# Altium PCB 传感器控制继电器模块.PCBDOC
Units mm, origin at the board's own origin, x right, y up, seen from the top; angles counter-clockwise.
Board outline 152.4 x 101.6 mm, 2 copper layers (Top Layer, Bottom Layer); 14 components, 11 nets, 44 pads, 1 vias.
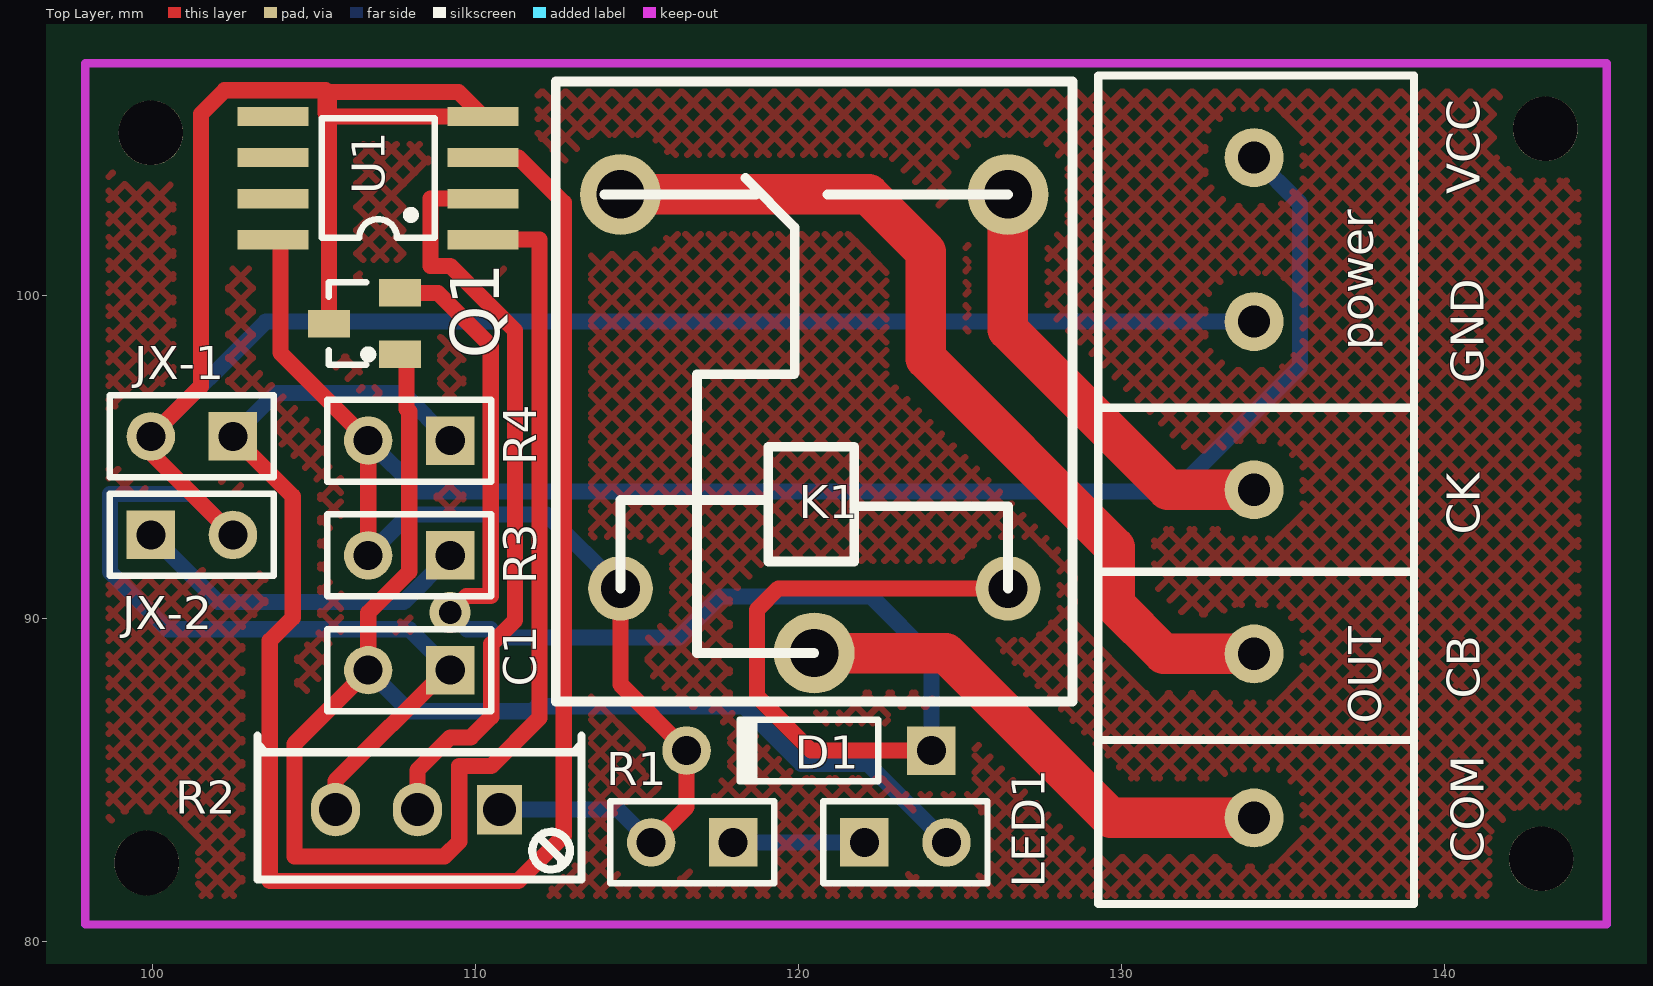
[diagram p0: Top Layer view]
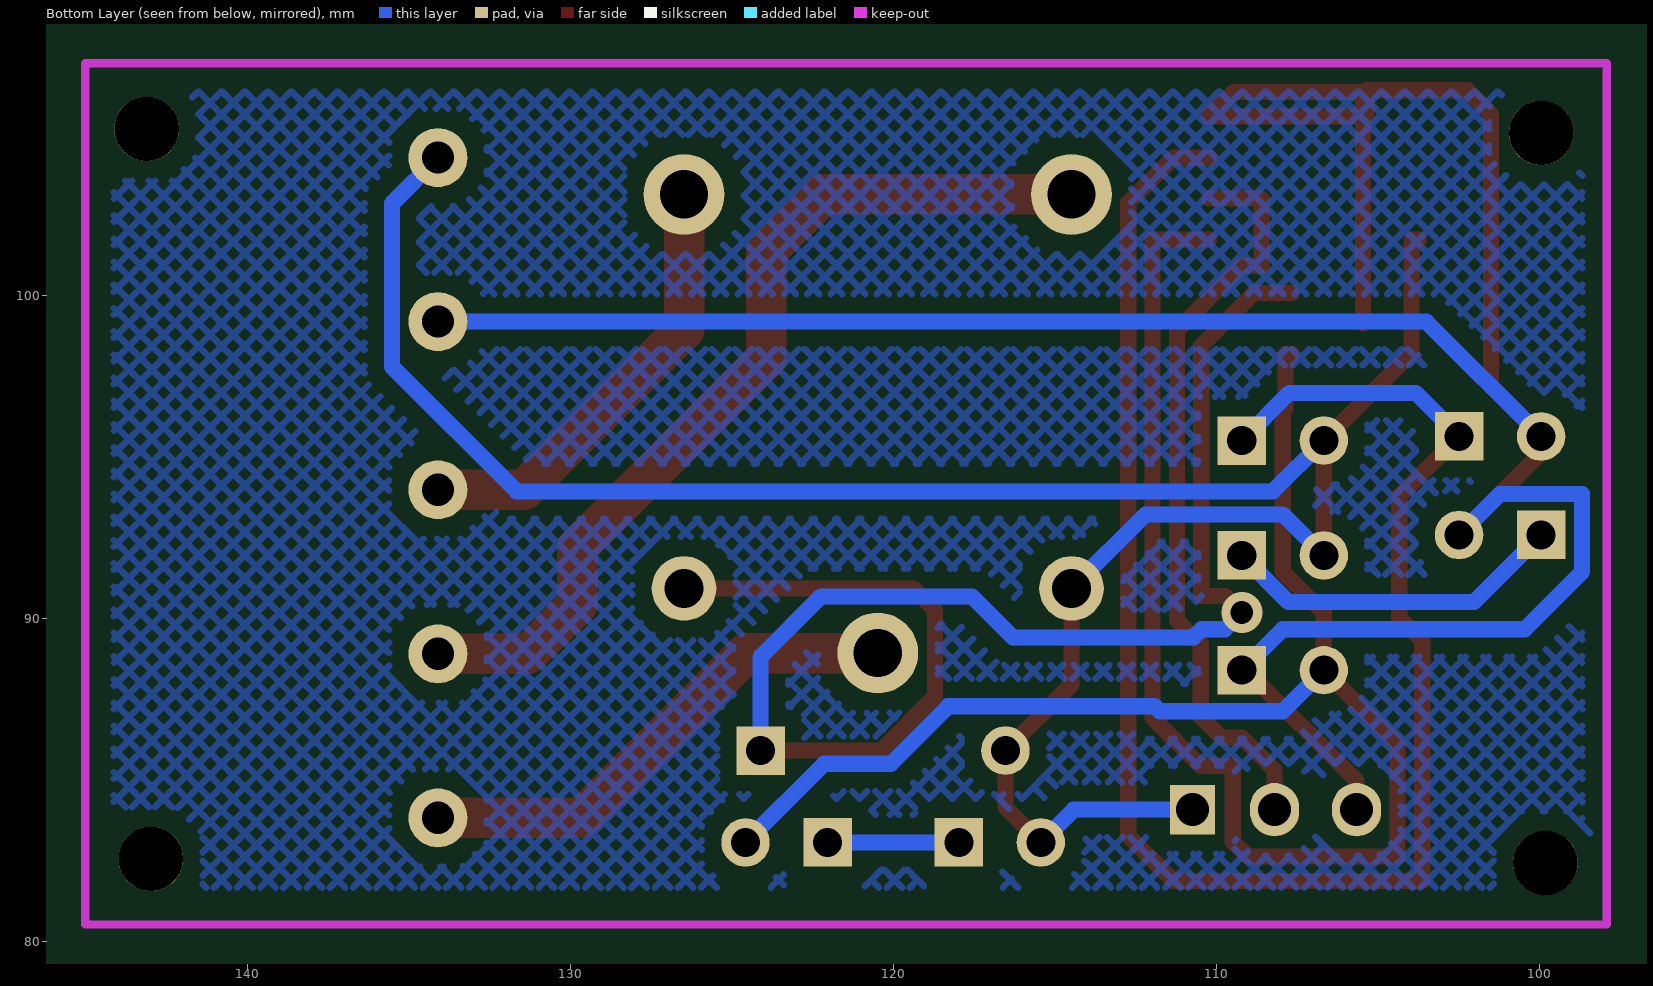
[diagram p1: Bottom Layer view, seen from below]

## Layer stack, top to bottom
Top Layer: signal copper 0.0356
Dielectric: dielectric 0.32, FR-4, Dk 4.8
Bottom Layer: signal copper 0.0356

## Board outline
25.4,25.4 177.8,25.4 177.8,127 25.4,127

## Design rules (kind name [scope] priority, off if disabled: settings)
Clearance [All] p1: gap=0.5
ComponentClearance [All] p1: gap=0.254 collisioncheckmode=3 verticalgap=0.254
PolygonConnect [All] p1: connectstyle=Relief reliefconductorwidth=0.254 reliefentries=4 polygonreliefangle="90 Angle"
RoomDefinition 传感器控制继电器模块 [InComponentClass('传感器控制继电器模块')] p1: confinementstyle=ConfineIn formatcopy=TRUE lockcomponents=FALSE outline 0,0 50.8,0 50.8,25.4 0,25.4
RoutingVias [All] p1: holewidth=0.711 width=1.27 viastyle="Through Hole" minholewidth=0.711 minwidth=1.27 maxholewidth=0.711 maxwidth=1.27
SolderMaskExpansion [All] p1: expansion=0.102
TestPointUsage [All] p1: valid=0 allowmultiple=FALSE
Testpoint [All] p1: side=15 testpointundercomponent=TRUE minsize=1.016 maxsize=2.54 preferedsize=1.524 minholesize=0 maxholesize=1.016 preferedholesize=0.813 testpointgrid=0.025 style=1023 order=0-112345678
Width Width_3 [InNet('NetK1_2')] p1: maxlimit=1.254 minlimit=1.254 preferedwidth=1.254
Width Width_2 [InNet('NetK1_3')] p2: maxlimit=1.254 minlimit=1.254 preferedwidth=1.254
Width Width_1 [InNet('NetK1_1')] p3: maxlimit=1.254 minlimit=1.254 preferedwidth=1.254
Width [All] p4: maxlimit=0.5 minlimit=0.5 preferedwidth=0.5
17 further rules are at their usual default settings.

## Components (designator, comment, footprint, x,y, rotation, side; value= is the part's Value field where it differs from the comment)
C1 "" HDR1X2 109.22,88.392 r180 top
D1 "ZL2JG" D-ZL-10 116.586,85.852 r180 top
JX-1 "" HDR1X2 102.489,95.631 r180 top
JX-2 "" HDR1X2 99.949,92.583 r0 top
K1 "JDQYCK" JQC-3F/T73 125.984,89.408 r90 top
LED1 "" HDR1X2 122.047,83.058 r0 top
OUT "PZ_3" JK128_3 136.017,89.027 r0 top
power "PZ_2" DYDZ 135.255,103.759 r0 top (schematic designator prower)
Q1 "TPSJG_PNP" SO-G3 106.68,100.076 r90 top
R1 "" HDR1X2 117.983,83.058 r180 top
R2 "" SIP3-D 110.744,84.328 r180 top
R3 "" HDR1X2 109.22,91.948 r180 top
R4 "" HDR1X2 109.22,95.504 r180 top
U1 "LM393AD" CDFP-8 110.744,106.172 r90 top

## Footprints (in the part's own frame and the unit in brackets; to place one, negate y for a bottom-side part, rotate by r counter-clockwise, add the part's x,y. Pads: shape width x height; smd on the part's side, far side on the other; paste and mask are expansions set on the pad)
CDFP-8 [mm] "贴片8管脚"
  rect 0.6x2.2 smd: 1(-4.445,0.508) 2(-3.175,0.508) 3(-1.905,0.508) 4(-0.635,0.508) 5(-0.635,7.008) 6(-1.905,7.008) 7(-3.175,7.008) 8(-4.445,7.008)
  silkscreen extent -4.39,2.01 -0.69,5.51
D-ZL-10 [mm] "整流二极管"
  rect 1.5x1.5 hole 0.9: 1(-7.532,-0.051)
  round 1.5 hole 0.9: 2(0.048,-0.051)
  silkscreen extent -5.89,-1 -1.5,0.9
DYDZ [mil] "接线端子"
  round 71.81 hole 39.37: 1(-45,20) 2(-45,-180)
  silkscreen extent -235,-285 150,120
HDR1X2 [mm] "Connector; Header; 2 Position"
  rect 1.5x1.5 hole 0.9: 1(0,0)
  round 1.5 hole 0.9: 2(2.54,0)
  silkscreen extent -1.27,-1.27 3.81,1.27
JK128_3 [mm] "接线端子_3"
  round 1.824 hole 1: 1(-1.905,4.953) 2(-1.905,-0.127) 3(-1.905,-5.207)
  silkscreen extent -6.73,-7.87 3.05,7.49
JQC-3F/T73 [mm] "继电器"
  round 2.5 hole 1.5: 1(13.716,-0.508) 2(13.716,11.492) 3(-0.484,5.492)
  round 2 hole 1.2: 4(1.516,11.492) 5(1.516,-0.508)
  silkscreen extent -1.98,-2.51 17.22,13.49
SIP3-D [mil] "精调电位器"
  rect 55x60 hole 40: 1(0,10)
  oval 60x65 hole 40: 2(200,10) 3(100,10)
  silkscreen extent -100,-80 295,95
SO-G3 [mm] "贴片三极管"
  rect 0.85x1.3 smd: 1(-1.9,-0.983) 2(0,-0.983) 3(-0.95,1.217)
  silkscreen extent -2.23,-0.13 0.32,1.22

## Part data
C1: library part "Cap Semi", "Capacitor (Semiconductor SIM Model)"
D1: "整流二极管"
JX-1: library part "Photo Sen", "Photosensitive Diode"
JX-2 LED1: library part LED3, "Typical BLUE SiC LED"
K1: "继电器——1常开1常闭"
OUT: "排针——3"
power: "排针——2"
Q1: "贴片三极管——PNP"
R1 R3 R4: library part Res2, "Resistor"
R2: library part RPot, "Potentiometer"
U1: "Low-Power Dual Voltage Comparator"

## Free pads (board coordinates)
  round 2 hole 2: 0(99.822,82.423) 0(99.949,105.029) 0(143.002,82.55) 0(143.129,105.156)

## Via types
v1: diameter 1.27, hole 0.711, Top Layer to Bottom Layer, 1 vias

## Nets (pads, with @x,y where several pads share a name; then routed paths per layer and width w, separated by ;. In a path a pad name is that pad's centre, name@x,y a point inside that pad or via, vN(x,y) a via of type N, cw(c..) or ccw(c..) an arc to the next point about the centre after c; other vN are vias at no path point)
GND: C1.1 JX-1.2 JX-2.2 power.2 Q1.3 R2.2 U1.4 | length 96.8
  Top Layer w0.5: JX-2.2 99.949,95.123 JX-1.2 101.498,97.18 101.498,105.613 102.235,106.35 105.359,106.35 105.359,105.639 105.461,105.537 105.463,105.537 ; Q1.3@105.461,99.126 Q1.3 105.463,105.537 ; R2.2 105.664,84.963 109.093,88.392 C1.1 ; 105.463,105.537 105.463,106.246 105.516,106.299 109.474,106.299 U1.4 105.463,105.537
  Bottom Layer w0.5: JX-1.2 103.505,99.187 power.2 ; JX-2.2 101.219,93.853 98.679,93.853 98.679,91.44 100.457,89.662 107.95,89.662 C1.1
NetC1_2: C1.2 LED1.2 Q1.1 U1.1 | length 64.8
  Top Layer w0.5: Q1.1 107.866,98.176 107.866,96.483 107.95,96.399 107.95,91.44 106.68,90.17 C1.2 104.394,86.106 104.394,82.626 109.042,82.626 109.499,83.083 109.499,85.42 110.49,85.42 111.982,86.912 111.982,101.727 U1.1
  Bottom Layer w0.5: C1.2 107.95,87.122 111.76,87.122 111.912,87.274 118.313,87.274 120.091,85.496 122.149,85.496 LED1.2
NetD1_1: D1.1 K1.5 Q1.2 | length 48.9
  Top Layer w0.5: Q1.2 108.839,100.076 110.474,98.441 110.474,90.694 109.728,90.694 v1(109.22,90.186) ; D1.1 120.395,85.903 118.72,87.579 118.72,90.264 119.38,90.924 K1.5
  Bottom Layer w0.5: v1(109.22,90.186) 109.744,89.662 110.465,89.662 110.719,89.408 116.307,89.408 117.577,90.678 122.25,90.678 124.118,88.81 D1.1
NetJX-1_1: JX-1.1 R4.1 U1.3 | length 55.1
  Top Layer w0.5: JX-1.1 104.343,93.777 104.343,90.018 103.632,89.306 103.632,81.864 111.328,81.864 112.736,83.272 112.736,102.87 111.339,104.267 U1.3
  Bottom Layer w0.5: JX-1.1 103.835,96.977 107.747,96.977 R4.1
NetJX-2_1: JX-2.1 R3.1 | length 10.7
  Bottom Layer w0.5: JX-2.1 102.032,90.5 107.772,90.5 R3.1
NetK1_1: K1.1 OUT.1 | length 13.9
  Top Layer w1.254: K1.1 126.492,98.933 131.445,93.98 OUT.1
NetK1_2: K1.2 OUT.2 | length 28.5
  Top Layer w1.254: K1.2 122.174,103.124 123.952,101.346 123.952,98.044 129.794,92.202 129.794,90.424 131.318,88.9 OUT.2
NetK1_3: K1.3 OUT.3 | length 15.7
  Top Layer w1.254: K1.3 124.563,88.924 129.667,83.82 OUT.3
NetLED1_1: LED1.1 R1.1 | length 4.1
  Bottom Layer w0.5: R1.1 LED1.1
NetR2_3: R2.3 U1.2 | length 23.6
  Top Layer w0.5: R2.3 108.204,85.293 109.22,86.309 109.855,86.309 110.49,86.944 110.49,89.202 111.228,89.94 111.228,98.906 109.22,100.914 108.61,100.914 108.61,102.997 U1.2
VCC: D1.2 K1.4 power.1 R1.2 R2.1 R3.2 R4.2 U1.8 | length 72.9
  Top Layer w0.5: U1.8 103.962,101.727 103.962,98.222 R4.2 R3.2 ; K1.4 114.492,87.949 D1.2 116.538,84.153 R1.2
  Bottom Layer w0.5: R3.2 107.95,93.218 112.198,93.218 K1.4 ; R4.2 108.255,93.929 131.674,93.929 135.534,97.79 135.534,102.845 power.1 ; R2.1 114.427,84.074 R1.2
pads on no net: U1.5 U1.6 U1.7

## Polygon pours and split planes (outlines as drawn)
no net on Top Layer (hatched 45Degree grid 0.508 track 0.203): 98.552,106.299 98.552,81.407 144.145,81.407 144.145,106.299
no net on Bottom Layer (hatched 45Degree grid 0.508 track 0.203): 98.679,106.172 98.679,81.661 144.145,81.661 144.145,106.299 98.806,106.299

## Keep-outs
Keep-Out Layer:
  lines w0.254: 97.917,80.518 97.917,107.188 145.034,107.188 145.034,80.518 97.917,80.518

## Silkscreen, mask and mechanical layers (free items; w line width, h text height)
Top Overlay:
  text "VCC" at 141.097,103.124 h1.02 r90
  text "GND" at 141.224,97.282 h1.02 r90
  text "CK" at 141.097,92.583 h1.02 r90
  text "CB" at 141.097,87.503 h1.02 r90
  text "COM" at 141.224,82.423 h1.02 r90
Mechanical 1:
  lines w0.4: 97.917,107.061 97.917,80.518 145.034,80.518 ; 97.917,107.188 145.034,107.188 ; 145.034,80.645 145.034,107.061